# Altium PCB ST-LINK-V0.1.PcbDoc (part 2 of 3)
Units mm, origin at the board's own origin, x right, y up, seen from the top; angles counter-clockwise.
Board outline 100 x 100 mm, 2 copper layers (Top Layer, Bottom Layer); 380 components, 33 nets, 1370 pads, 550 vias.
Unrouted connection lines stored in the file: 288.
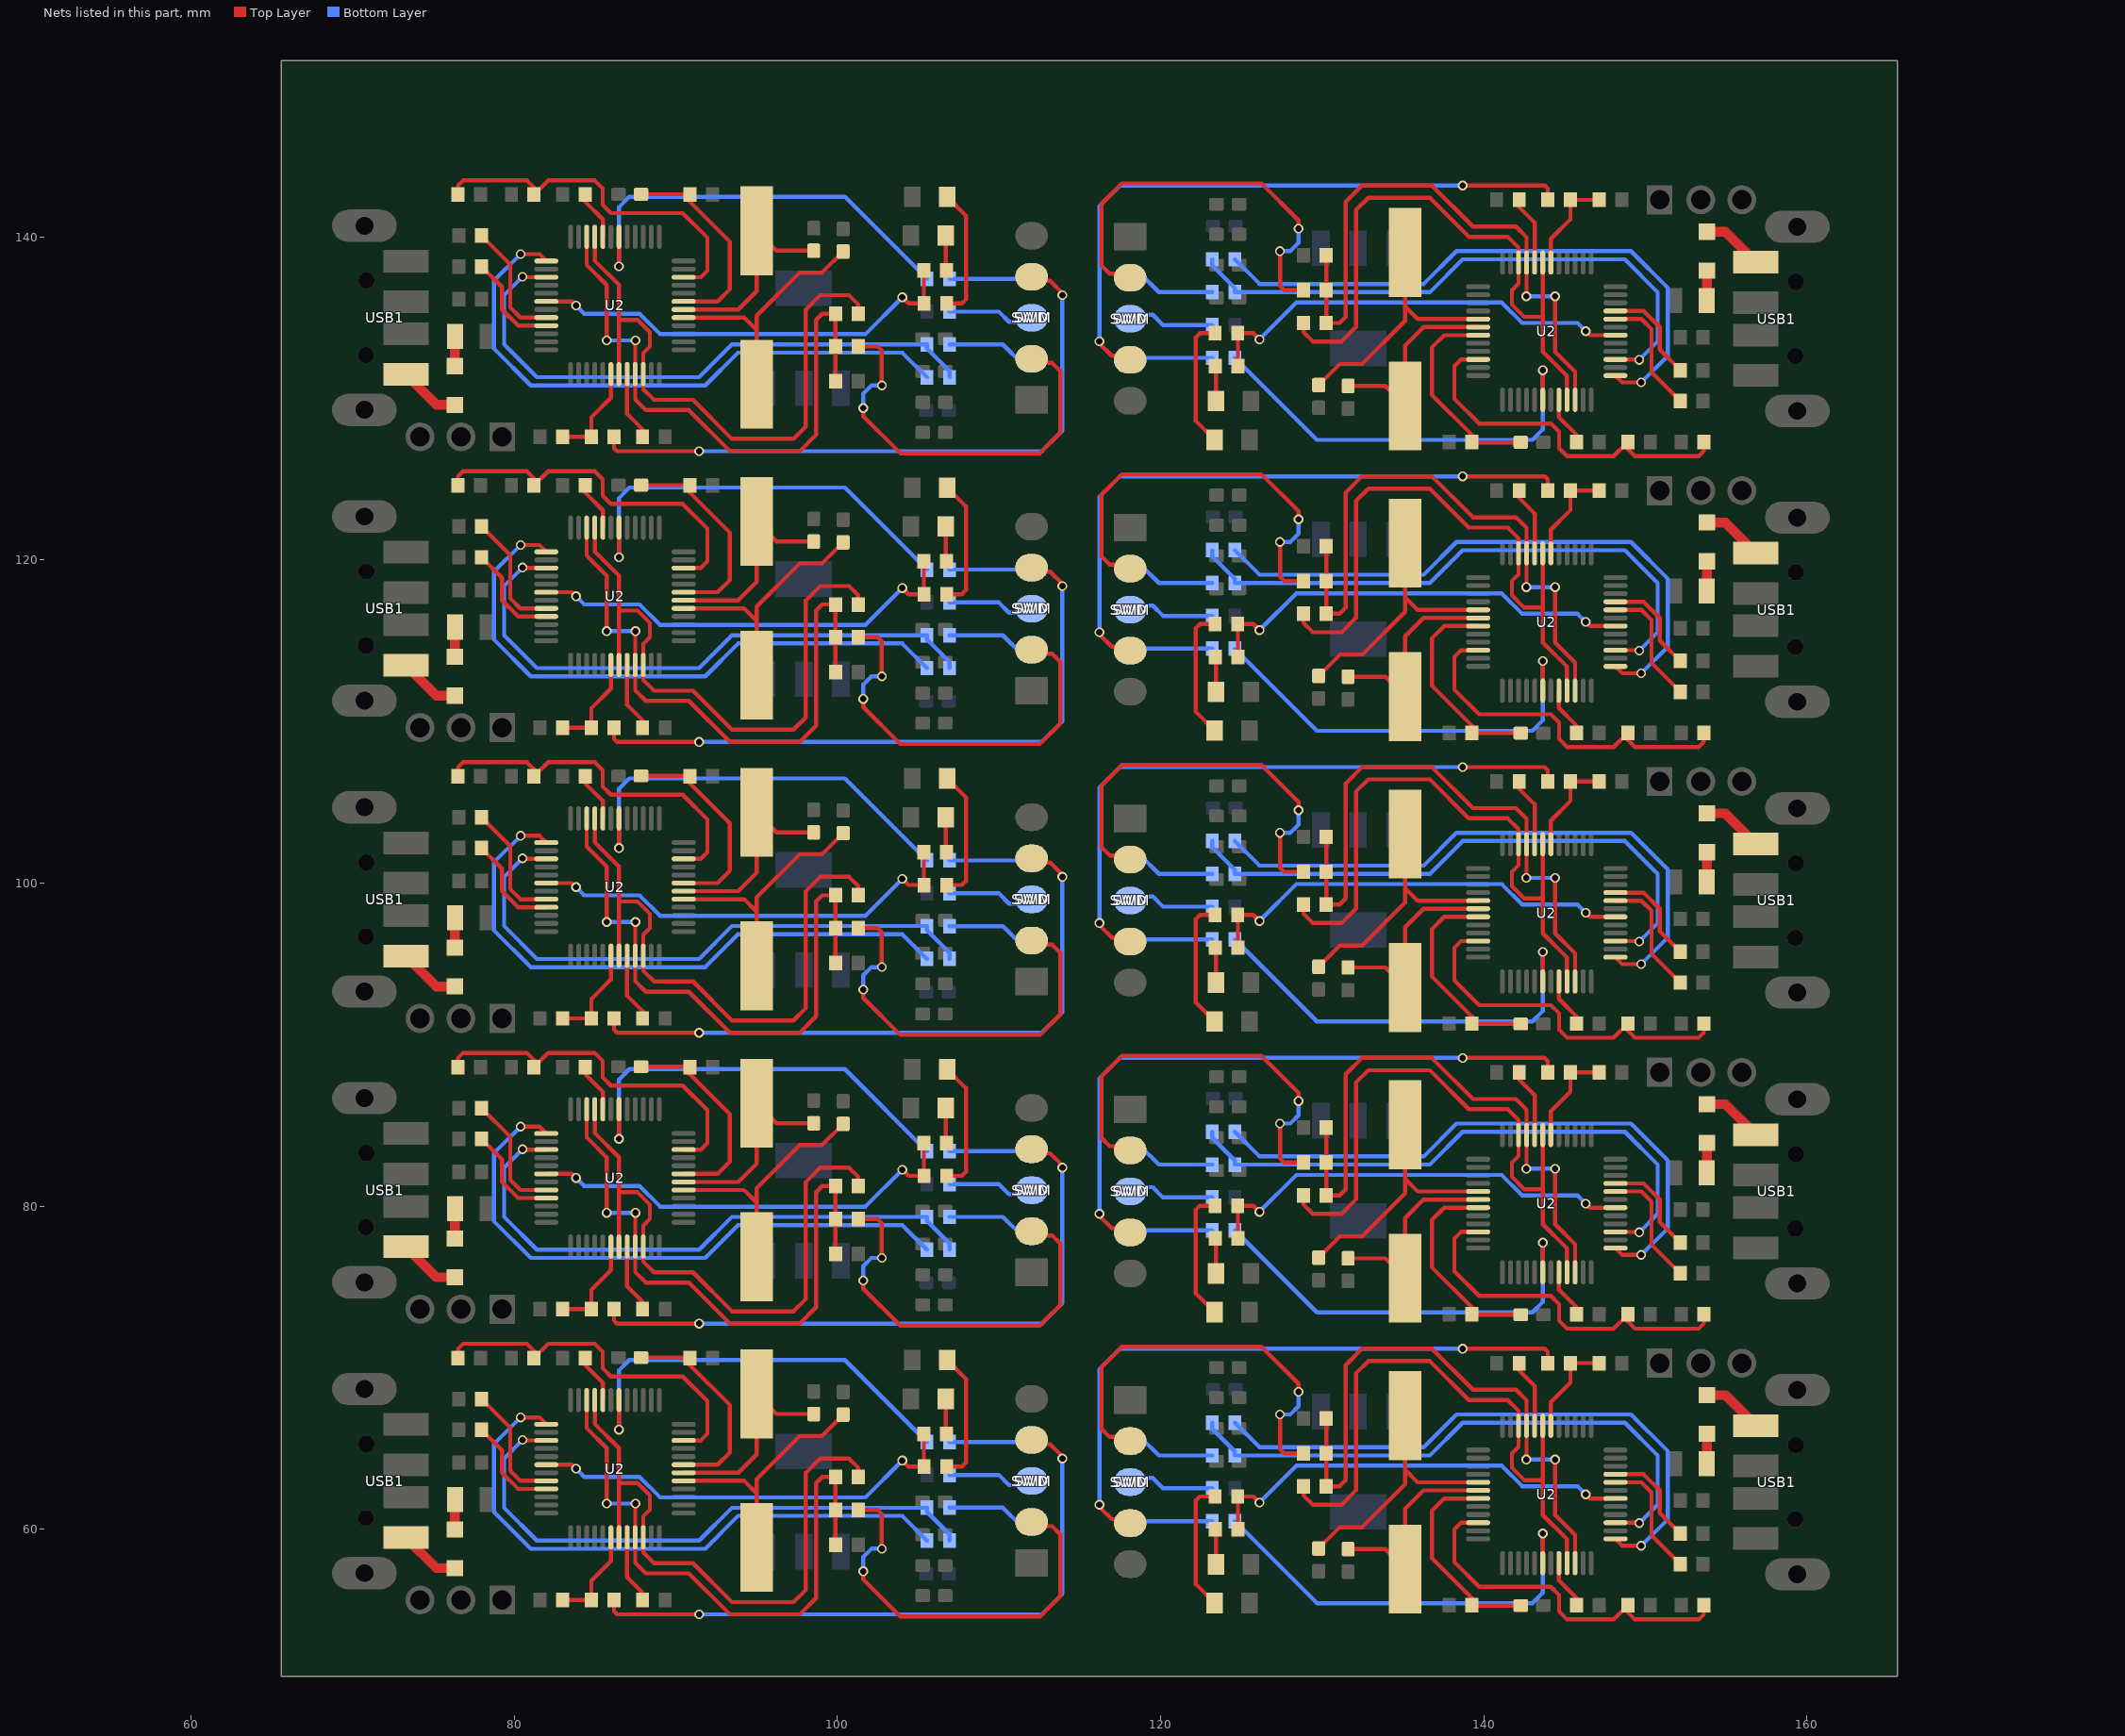
[diagram p2: the nets of this part, all layers, seen from the top]

## Via types
v1: diameter 0.6, hole 0.4, Top Layer to Bottom Layer, 520 vias
v2: diameter 0.7, hole 0.5, Top Layer to Bottom Layer, 20 vias
v3: diameter 0.8, hole 0.6, Top Layer to Bottom Layer, 10 vias

## Nets (pads, with @x,y where several pads share a name; then routed paths per layer and width w, separated by ;. In a path a pad name is that pad's centre, name@x,y a point inside that pad or via, vN(x,y) a via of type N, cw(c..) or ccw(c..) an arc to the next point about the centre after c; other vN are vias at no path point) (continued)
JTMS: R1.2 R2.2 U2.27 | length 366
  Top Layer w0.25: v1(80.518,65.532) 80.546,65.504 U2.27@81.983,65.504 ; v1(80.518,83.532) 80.546,83.504 U2.27@81.983,83.504 ; v1(80.518,101.532) 80.546,101.504 U2.27@81.983,101.504 ; v1(80.518,119.532) 80.546,119.504 U2.27@81.983,119.504 ; v1(80.518,137.532) 80.546,137.504 U2.27@81.983,137.504 ; U2.27@148.144,60.413 149.581,60.413 v1(149.609,60.385) ; U2.27@148.144,78.413 149.581,78.413 v1(149.609,78.385) ; U2.27@148.144,96.413 149.581,96.413 v1(149.609,96.385) ; U2.27@148.144,114.413 149.581,114.413 v1(149.609,114.385) ; U2.27@148.144,132.413 149.581,132.413 v1(149.609,132.385)
  Bottom Layer w0.25: v1(80.518,65.532) 79.375,64.389 79.375,61.341 81.407,59.309 91.44,59.309 93.472,61.341 R2.2@105.534,61.341 105.534,61.09 106.934,59.69 R1.2@106.934,59.309 ; v1(80.518,83.532) 79.375,82.389 79.375,79.341 81.407,77.309 91.44,77.309 93.472,79.341 R2.2@105.534,79.341 105.534,79.09 106.934,77.69 R1.2@106.934,77.309 ; v1(80.518,101.532) 79.375,100.389 79.375,97.341 81.407,95.309 91.44,95.309 93.472,97.341 R2.2@105.534,97.341 105.534,97.09 106.934,95.69 R1.2@106.934,95.309 ; v1(80.518,119.532) 79.375,118.389 79.375,115.341 81.407,113.309 91.44,113.309 93.472,115.341 R2.2@105.534,115.341 105.534,115.09 106.934,113.69 R1.2@106.934,113.309 ; v1(80.518,137.532) 79.375,136.389 79.375,133.341 81.407,131.309 91.44,131.309 93.472,133.341 R2.2@105.534,133.341 105.534,133.09 106.934,131.69 R1.2@106.934,131.309 ; R1.2@123.193,66.608 123.193,66.227 124.593,64.827 R2.2@124.593,64.576 136.655,64.576 138.687,66.608 148.72,66.608 150.752,64.576 150.752,61.528 v1(149.609,60.385) ; R1.2@123.193,84.608 123.193,84.227 124.593,82.827 R2.2@124.593,82.576 136.655,82.576 138.687,84.608 148.72,84.608 150.752,82.576 150.752,79.528 v1(149.609,78.385) ; R1.2@123.193,102.608 123.193,102.227 124.593,100.827 R2.2@124.593,100.576 136.655,100.576 138.687,102.608 148.72,102.608 150.752,100.576 150.752,97.528 v1(149.609,96.385) ; R1.2@123.193,120.608 123.193,120.227 124.593,118.827 R2.2@124.593,118.576 136.655,118.576 138.687,120.608 148.72,120.608 150.752,118.576 150.752,115.528 v1(149.609,114.385) ; R1.2@123.193,138.608 123.193,138.227 124.593,136.827 R2.2@124.593,136.576 136.655,136.576 138.687,138.608 148.72,138.608 150.752,136.576 150.752,133.528 v1(149.609,132.385)
LED: R11.1 R12.1 U2.30 | length 273.4
  Top Layer w0.254: U2.30@81.983,64.004 83.57,64.004 v1(83.82,63.754) ; U2.30@81.983,82.004 83.57,82.004 v1(83.82,81.754) ; U2.30@81.983,100.004 83.57,100.004 v1(83.82,99.754) ; U2.30@81.983,118.004 83.57,118.004 v1(83.82,117.754) ; U2.30@81.983,136.004 83.57,136.004 v1(83.82,135.754) ; v1(104.013,64.262) 104.394,63.881 R12.1@105.369,63.881 ; v1(104.013,82.262) 104.394,81.881 R12.1@105.369,81.881 ; v1(104.013,100.262) 104.394,99.881 R12.1@105.369,99.881 ; v1(104.013,118.262) 104.394,117.881 R12.1@105.369,117.881 ; v1(104.013,136.262) 104.394,135.881 R12.1@105.369,135.881 ; R12.1@105.345,63.905 R11.1@105.345,65.913 ; R12.1@105.345,81.905 R11.1@105.345,83.913 ; R12.1@105.345,99.905 R11.1@105.345,101.913 ; R12.1@105.345,117.905 R11.1@105.345,119.913 ; R12.1@105.345,135.905 R11.1@105.345,137.913 ; R12.1@124.759,62.036 125.733,62.036 v1(126.114,61.655) ; R12.1@124.759,80.036 125.733,80.036 v1(126.114,79.655) ; R12.1@124.759,98.036 125.733,98.036 v1(126.114,97.655) ; R12.1@124.759,116.036 125.733,116.036 v1(126.114,115.655) ; R12.1@124.759,134.036 125.733,134.036 v1(126.114,133.655) ; R11.1@124.782,60.004 R12.1@124.782,62.012 ; R11.1@124.782,78.004 R12.1@124.782,80.012 ; R11.1@124.782,96.004 R12.1@124.782,98.012 ; R11.1@124.782,114.004 R12.1@124.782,116.012 ; R11.1@124.782,132.004 R12.1@124.782,134.012 ; v1(146.307,62.163) 146.557,61.913 U2.30@148.144,61.913 ; v1(146.307,80.163) 146.557,79.913 U2.30@148.144,79.913 ; v1(146.307,98.163) 146.557,97.913 U2.30@148.144,97.913 ; v1(146.307,116.163) 146.557,115.913 U2.30@148.144,115.913 ; v1(146.307,134.163) 146.557,133.913 U2.30@148.144,133.913
  Bottom Layer w0.254: v1(83.82,63.754) 84.328,63.246 87.757,63.246 89.027,61.976 101.727,61.976 v1(104.013,64.262) ; v1(83.82,81.754) 84.328,81.246 87.757,81.246 89.027,79.976 101.727,79.976 v1(104.013,82.262) ; v1(83.82,99.754) 84.328,99.246 87.757,99.246 89.027,97.976 101.727,97.976 v1(104.013,100.262) ; v1(83.82,117.754) 84.328,117.246 87.757,117.246 89.027,115.976 101.727,115.976 v1(104.013,118.262) ; v1(83.82,135.754) 84.328,135.246 87.757,135.246 89.027,133.976 101.727,133.976 v1(104.013,136.262) ; v1(126.114,61.655) 128.4,63.941 141.1,63.941 142.37,62.671 145.799,62.671 v1(146.307,62.163) ; v1(126.114,79.655) 128.4,81.941 141.1,81.941 142.37,80.671 145.799,80.671 v1(146.307,80.163) ; v1(126.114,97.655) 128.4,99.941 141.1,99.941 142.37,98.671 145.799,98.671 v1(146.307,98.163) ; v1(126.114,115.655) 128.4,117.941 141.1,117.941 142.37,116.671 145.799,116.671 v1(146.307,116.163) ; v1(126.114,133.655) 128.4,135.941 141.1,135.941 142.37,134.671 145.799,134.671 v1(146.307,134.163)
NetC2_1: C2.1 U2.5 Y1.2 | length 160.8
  Top Layer w0.254: U2.5@90.483,63.004 94.222,63.004 94.996,62.23 ; U2.5@90.483,81.004 94.222,81.004 94.996,80.23 ; U2.5@90.483,99.004 94.222,99.004 94.996,98.23 ; U2.5@90.483,117.004 94.222,117.004 94.996,116.23 ; U2.5@90.483,135.004 94.222,135.004 94.996,134.23 ; Y1.2@94.996,58.877 94.996,62.23 ; Y1.2@94.996,76.877 94.996,80.23 ; Y1.2@94.996,94.877 94.996,98.23 ; Y1.2@94.996,112.877 94.996,116.23 ; Y1.2@94.996,130.877 94.996,134.23 ; C2.1@100.352,67.096 99.042,65.786 97.663,65.786 94.996,63.119 94.996,62.23 ; C2.1@100.352,85.096 99.042,83.786 97.663,83.786 94.996,81.119 94.996,80.23 ; C2.1@100.352,103.096 99.042,101.786 97.663,101.786 94.996,99.119 94.996,98.23 ; C2.1@100.352,121.096 99.042,119.786 97.663,119.786 94.996,117.119 94.996,116.23 ; C2.1@100.352,139.096 99.042,137.786 97.663,137.786 94.996,135.119 94.996,134.23 ; C2.1@129.775,58.821 131.085,60.131 132.464,60.131 135.131,62.798 135.131,63.687 ; C2.1@129.775,76.821 131.085,78.131 132.464,78.131 135.131,80.798 135.131,81.687 ; C2.1@129.775,94.821 131.085,96.131 132.464,96.131 135.131,98.798 135.131,99.687 ; C2.1@129.775,112.821 131.085,114.131 132.464,114.131 135.131,116.798 135.131,117.687 ; C2.1@129.775,130.821 131.085,132.131 132.464,132.131 135.131,134.798 135.131,135.687 ; Y1.2@135.131,67.04 135.131,63.687 ; Y1.2@135.131,85.04 135.131,81.687 ; Y1.2@135.131,103.04 135.131,99.687 ; Y1.2@135.131,121.04 135.131,117.687 ; Y1.2@135.131,139.04 135.131,135.687 ; U2.5@139.644,62.913 135.905,62.913 135.131,63.687 ; U2.5@139.644,80.913 135.905,80.913 135.131,81.687 ; U2.5@139.644,98.913 135.905,98.913 135.131,99.687 ; U2.5@139.644,116.913 135.905,116.913 135.131,117.687 ; U2.5@139.644,134.913 135.905,134.913 135.131,135.687
NetC3_2: C3.2 U2.6 Y1.1 | length 127.7
  Top Layer w0.254: U2.6@90.483,63.504 93.857,63.504 94.996,64.643 Y1.1@94.996,68.377 96.233,67.14 C3.2@98.53,67.14 ; U2.6@90.483,81.504 93.857,81.504 94.996,82.643 Y1.1@94.996,86.377 96.233,85.14 C3.2@98.53,85.14 ; U2.6@90.483,99.504 93.857,99.504 94.996,100.643 Y1.1@94.996,104.377 96.233,103.14 C3.2@98.53,103.14 ; U2.6@90.483,117.504 93.857,117.504 94.996,118.643 Y1.1@94.996,122.377 96.233,121.14 C3.2@98.53,121.14 ; U2.6@90.483,135.504 93.857,135.504 94.996,136.643 Y1.1@94.996,140.377 96.233,139.14 C3.2@98.53,139.14 ; C3.2@131.597,58.777 133.894,58.777 Y1.1@135.131,57.54 135.131,61.274 136.27,62.413 U2.6@139.644,62.413 ; C3.2@131.597,76.777 133.894,76.777 Y1.1@135.131,75.54 135.131,79.274 136.27,80.413 U2.6@139.644,80.413 ; C3.2@131.597,94.777 133.894,94.777 Y1.1@135.131,93.54 135.131,97.274 136.27,98.413 U2.6@139.644,98.413 ; C3.2@131.597,112.777 133.894,112.777 Y1.1@135.131,111.54 135.131,115.274 136.27,116.413 U2.6@139.644,116.413 ; C3.2@131.597,130.777 133.894,130.777 Y1.1@135.131,129.54 135.131,133.274 136.27,134.413 U2.6@139.644,134.413
NetD1_1: D1.1 U3.1 | length 18.5
  Top Layer w0.6: D1.1@76.327,60.001 76.327,61.833 U3.1@76.343,61.849 ; D1.1@76.327,78.001 76.327,79.833 U3.1@76.343,79.849 ; D1.1@76.327,96.001 76.327,97.833 U3.1@76.343,97.849 ; D1.1@76.327,114.001 76.327,115.833 U3.1@76.343,115.849 ; D1.1@76.327,132.001 76.327,133.833 U3.1@76.343,133.849 ; U3.1@153.784,64.068 153.8,64.084 D1.1@153.8,65.916 ; U3.1@153.784,82.068 153.8,82.084 D1.1@153.8,83.916 ; U3.1@153.784,100.068 153.8,100.084 D1.1@153.8,101.916 ; U3.1@153.784,118.068 153.8,118.084 D1.1@153.8,119.916 ; U3.1@153.784,136.068 153.8,136.084 D1.1@153.8,137.916
NetD1_2: D1.2 USB1.1 | length 43.1
  Top Layer w0.254: USB1.1@73.292,59.492 USB1.1@73.786,59.492 ; USB1.1@73.292,77.492 USB1.1@73.786,77.492 ; USB1.1@73.292,95.492 USB1.1@73.786,95.492 ; USB1.1@73.292,113.492 USB1.1@73.786,113.492 ; USB1.1@73.292,131.492 USB1.1@73.786,131.492 ; USB1.1@156.341,66.425 USB1.1@156.836,66.425 ; USB1.1@156.341,84.425 USB1.1@156.836,84.425 ; USB1.1@156.341,102.425 USB1.1@156.836,102.425 ; USB1.1@156.341,120.425 USB1.1@156.836,120.425 ; USB1.1@156.341,138.425 USB1.1@156.836,138.425
  Top Layer w0.6: USB1.1@73.292,59.492 75.183,57.601 D1.2@76.327,57.601 ; USB1.1@73.292,77.492 75.183,75.601 D1.2@76.327,75.601 ; USB1.1@73.292,95.492 75.183,93.601 D1.2@76.327,93.601 ; USB1.1@73.292,113.492 75.183,111.601 D1.2@76.327,111.601 ; USB1.1@73.292,131.492 75.183,129.601 D1.2@76.327,129.601 ; D1.2@153.8,68.316 154.945,68.316 USB1.1@156.836,66.425 ; D1.2@153.8,86.316 154.945,86.316 USB1.1@156.836,84.425 ; D1.2@153.8,104.316 154.945,104.316 USB1.1@156.836,102.425 ; D1.2@153.8,122.316 154.945,122.316 USB1.1@156.836,120.425 ; D1.2@153.8,140.316 154.945,140.316 USB1.1@156.836,138.425
NetHL1_2: HL1.2 R11.2 | length 21.2
  Top Layer w0.254: R11.2@106.699,65.959 HL1.2@106.699,68.079 ; R11.2@106.699,83.959 HL1.2@106.699,86.079 ; R11.2@106.699,101.959 HL1.2@106.699,104.079 ; R11.2@106.699,119.959 HL1.2@106.699,122.079 ; R11.2@106.699,137.959 HL1.2@106.699,140.079 ; HL1.2@123.428,57.838 R11.2@123.428,59.958 ; HL1.2@123.428,75.838 R11.2@123.428,77.958 ; HL1.2@123.428,93.838 R11.2@123.428,95.958 ; HL1.2@123.428,111.838 R11.2@123.428,113.958 ; HL1.2@123.428,129.838 R11.2@123.428,131.958
NetHL2_1: HL2.1 R12.2 | length 81.1
  Top Layer w0.254: R12.2@106.769,63.881 107.696,63.881 107.95,64.135 107.95,69.315 HL2.1@106.788,70.478 ; R12.2@106.769,81.881 107.696,81.881 107.95,82.135 107.95,87.316 HL2.1@106.788,88.478 ; R12.2@106.769,99.881 107.696,99.881 107.95,100.135 107.95,105.316 HL2.1@106.788,106.478 ; R12.2@106.769,117.881 107.696,117.881 107.95,118.135 107.95,123.316 HL2.1@106.788,124.478 ; R12.2@106.769,135.881 107.696,135.881 107.95,136.135 107.95,141.316 HL2.1@106.788,142.478 ; HL2.1@123.34,55.439 122.177,56.601 122.177,61.782 122.431,62.036 R12.2@123.359,62.036 ; HL2.1@123.34,73.439 122.177,74.601 122.177,79.782 122.431,80.036 R12.2@123.359,80.036 ; HL2.1@123.34,91.439 122.177,92.601 122.177,97.782 122.431,98.036 R12.2@123.359,98.036 ; HL2.1@123.34,109.439 122.177,110.601 122.177,115.782 122.431,116.036 R12.2@123.359,116.036 ; HL2.1@123.34,127.439 122.177,128.601 122.177,133.782 122.431,134.036 R12.2@123.359,134.036
NetJ1_2: R2.1 SWD.2 | length 54.3
  Bottom Layer w0.254: R2.1@106.934,61.341 110.236,61.341 111.379,60.198 SWD.2@111.887,60.198 ; R2.1@106.934,79.341 110.236,79.341 111.379,78.198 SWD.2@111.887,78.198 ; R2.1@106.934,97.341 110.236,97.341 111.379,96.198 SWD.2@111.887,96.198 ; R2.1@106.934,115.341 110.236,115.341 111.379,114.198 SWD.2@111.887,114.198 ; R2.1@106.934,133.341 110.236,133.341 111.379,132.198 SWD.2@111.887,132.198 ; SWD.2@118.24,65.719 118.748,65.719 119.891,64.576 R2.1@123.193,64.576 ; SWD.2@118.24,83.719 118.748,83.719 119.891,82.576 R2.1@123.193,82.576 ; SWD.2@118.24,101.719 118.748,101.719 119.891,100.576 R2.1@123.193,100.576 ; SWD.2@118.24,119.719 118.748,119.719 119.891,118.576 R2.1@123.193,118.576 ; SWD.2@118.24,137.719 118.748,137.719 119.891,136.576 R2.1@123.193,136.576
NetJ1_3: R3.1 SWD.3 | length 53.4
  Bottom Layer w0.254: R3.1@106.934,63.373 109.982,63.373 110.617,62.738 SWD.3@112.014,62.738 ; R3.1@106.934,81.373 109.982,81.373 110.617,80.738 SWD.3@112.014,80.738 ; R3.1@106.934,99.373 109.982,99.373 110.617,98.738 SWD.3@112.014,98.738 ; R3.1@106.934,117.373 109.982,117.373 110.617,116.738 SWD.3@112.014,116.738 ; R3.1@106.934,135.373 109.982,135.373 110.617,134.738 SWD.3@112.014,134.738 ; SWD.3@118.113,63.179 119.51,63.179 120.145,62.544 R3.1@123.193,62.544 ; SWD.3@118.113,81.179 119.51,81.179 120.145,80.544 R3.1@123.193,80.544 ; SWD.3@118.113,99.179 119.51,99.179 120.145,98.544 R3.1@123.193,98.544 ; SWD.3@118.113,117.179 119.51,117.179 120.145,116.544 R3.1@123.193,116.544 ; SWD.3@118.113,135.179 119.51,135.179 120.145,134.544 R3.1@123.193,134.544
NetJ1_4: R4.1 SWD.4 | length 48.3
  Bottom Layer w0.254: R4.1@106.934,65.405 SWD.4@111.76,65.405 ; R4.1@106.934,83.405 SWD.4@111.76,83.405 ; R4.1@106.934,101.405 SWD.4@111.76,101.405 ; R4.1@106.934,119.405 SWD.4@111.76,119.405 ; R4.1@106.934,137.405 SWD.4@111.76,137.405 ; SWD.4@118.367,60.512 R4.1@123.193,60.512 ; SWD.4@118.367,78.512 R4.1@123.193,78.512 ; SWD.4@118.367,96.512 R4.1@123.193,96.512 ; SWD.4@118.367,114.512 R4.1@123.193,114.512 ; SWD.4@118.367,132.512 R4.1@123.193,132.512
NetJ2_2: R10.1 SWIM.2 | length 260.6
  Top Layer w0.254: R10.1@101.284,61.214 102.489,61.214 102.743,60.96 v1(102.743,58.801) ; R10.1@101.284,79.214 102.489,79.214 102.743,78.96 v1(102.743,76.801) ; R10.1@101.284,97.214 102.489,97.214 102.743,96.96 v1(102.743,94.801) ; R10.1@101.284,115.214 102.489,115.214 102.743,114.96 v1(102.743,112.801) ; R10.1@101.284,133.214 102.489,133.214 102.743,132.96 v1(102.743,130.801) ; v1(101.6,57.404) 101.6,56.896 103.886,54.61 112.522,54.61 113.792,55.88 113.792,59.69 113.284,60.198 SWIM.2@111.887,60.198 ; v1(101.6,75.404) 101.6,74.896 103.886,72.61 112.522,72.61 113.792,73.88 113.792,77.69 113.284,78.198 SWIM.2@111.887,78.198 ; v1(101.6,93.404) 101.6,92.896 103.886,90.61 112.522,90.61 113.792,91.88 113.792,95.69 113.284,96.198 SWIM.2@111.887,96.198 ; v1(101.6,111.404) 101.6,110.896 103.886,108.61 112.522,108.61 113.792,109.88 113.792,113.69 113.284,114.198 SWIM.2@111.887,114.198 ; v1(101.6,129.404) 101.6,128.896 103.886,126.61 112.522,126.61 113.792,127.88 113.792,131.69 113.284,132.198 SWIM.2@111.887,132.198 ; SWIM.2@118.24,65.719 116.843,65.719 116.335,66.227 116.335,70.037 117.605,71.307 126.241,71.307 128.527,69.021 v1(128.527,68.513) ; SWIM.2@118.24,83.719 116.843,83.719 116.335,84.227 116.335,88.037 117.605,89.307 126.241,89.307 128.527,87.021 v1(128.527,86.513) ; SWIM.2@118.24,101.719 116.843,101.719 116.335,102.227 116.335,106.037 117.605,107.307 126.241,107.307 128.527,105.021 v1(128.527,104.513) ; SWIM.2@118.24,119.719 116.843,119.719 116.335,120.227 116.335,124.037 117.605,125.307 126.241,125.307 128.527,123.021 v1(128.527,122.513) ; SWIM.2@118.24,137.719 116.843,137.719 116.335,138.227 116.335,142.037 117.605,143.307 126.241,143.307 128.527,141.021 v1(128.527,140.513) ; v1(127.384,67.116) 127.384,64.957 127.638,64.703 R10.1@128.844,64.703 ; v1(127.384,85.116) 127.384,82.957 127.638,82.703 R10.1@128.844,82.703 ; v1(127.384,103.116) 127.384,100.957 127.638,100.703 R10.1@128.844,100.703 ; v1(127.384,121.116) 127.384,118.957 127.638,118.703 R10.1@128.844,118.703 ; v1(127.384,139.116) 127.384,136.957 127.638,136.703 R10.1@128.844,136.703
  Bottom Layer w0.254: v1(101.6,57.404) 101.6,58.293 102.108,58.801 v1(102.743,58.801) ; v1(101.6,75.404) 101.6,76.293 102.108,76.801 v1(102.743,76.801) ; v1(101.6,93.404) 101.6,94.293 102.108,94.801 v1(102.743,94.801) ; v1(101.6,111.404) 101.6,112.293 102.108,112.801 v1(102.743,112.801) ; v1(101.6,129.404) 101.6,130.293 102.108,130.801 v1(102.743,130.801) ; v1(127.384,67.116) 128.019,67.116 128.527,67.624 v1(128.527,68.513) ; v1(127.384,85.116) 128.019,85.116 128.527,85.624 v1(128.527,86.513) ; v1(127.384,103.116) 128.019,103.116 128.527,103.624 v1(128.527,104.513) ; v1(127.384,121.116) 128.019,121.116 128.527,121.624 v1(128.527,122.513) ; v1(127.384,139.116) 128.019,139.116 128.527,139.624 v1(128.527,140.513)
NetJ2_4: R13.1 SWIM.4 | length 399.1
  Top Layer w0.254: R13.1@86.171,55.626 86.171,54.926 86.36,54.737 v1(91.44,54.737) ; R13.1@86.171,73.626 86.171,72.926 86.36,72.737 v1(91.44,72.737) ; R13.1@86.171,91.626 86.171,90.926 86.36,90.737 v1(91.44,90.737) ; R13.1@86.171,109.626 86.171,108.926 86.36,108.737 v1(91.44,108.737) ; R13.1@86.171,127.626 86.171,126.926 86.36,126.737 v1(91.44,126.737) ; SWIM.4@111.887,65.278 113.157,65.278 113.919,64.516 v1(113.919,64.389) ; SWIM.4@111.887,83.278 113.157,83.278 113.919,82.516 v1(113.919,82.389) ; SWIM.4@111.887,101.278 113.157,101.278 113.919,100.516 v1(113.919,100.389) ; SWIM.4@111.887,119.278 113.157,119.278 113.919,118.516 v1(113.919,118.389) ; SWIM.4@111.887,137.278 113.157,137.278 113.919,136.516 v1(113.919,136.389) ; v1(116.208,61.528) 116.208,61.401 116.97,60.639 SWIM.4@118.24,60.639 ; v1(116.208,79.528) 116.208,79.401 116.97,78.639 SWIM.4@118.24,78.639 ; v1(116.208,97.528) 116.208,97.401 116.97,96.639 SWIM.4@118.24,96.639 ; v1(116.208,115.528) 116.208,115.401 116.97,114.639 SWIM.4@118.24,114.639 ; v1(116.208,133.528) 116.208,133.401 116.97,132.639 SWIM.4@118.24,132.639 ; v1(138.687,71.18) 143.767,71.18 143.957,70.991 R13.1@143.957,70.291 ; v1(138.687,89.18) 143.767,89.18 143.957,88.991 R13.1@143.957,88.291 ; v1(138.687,107.18) 143.767,107.18 143.957,106.991 R13.1@143.957,106.291 ; v1(138.687,125.18) 143.767,125.18 143.957,124.991 R13.1@143.957,124.291 ; v1(138.687,143.18) 143.767,143.18 143.957,142.991 R13.1@143.957,142.291
  Bottom Layer w0.254: v1(91.44,54.737) 112.649,54.737 113.919,56.007 v1(113.919,64.389) ; v1(91.44,72.737) 112.649,72.737 113.919,74.007 v1(113.919,82.389) ; v1(91.44,90.737) 112.649,90.737 113.919,92.007 v1(113.919,100.389) ; v1(91.44,108.737) 112.649,108.737 113.919,110.007 v1(113.919,118.389) ; v1(91.44,126.737) 112.649,126.737 113.919,128.007 v1(113.919,136.389) ; v1(116.208,61.528) 116.208,69.91 117.478,71.18 v1(138.687,71.18) ; v1(116.208,79.528) 116.208,87.91 117.478,89.18 v1(138.687,89.18) ; v1(116.208,97.528) 116.208,105.91 117.478,107.18 v1(138.687,107.18) ; v1(116.208,115.528) 116.208,123.91 117.478,125.18 v1(138.687,125.18) ; v1(116.208,133.528) 116.208,141.91 117.478,143.18 v1(138.687,143.18)
NetR5_2: R5.2 R6.1 U2.10 | length 228.4
  Top Layer w0.254: R6.1@76.516,70.612 76.516,71.172 76.835,71.491 80.782,71.491 81.218,71.055 R5.2@81.218,70.612 82.097,71.491 84.973,71.491 85.471,70.993 85.471,69.977 85.979,69.469 90.424,69.469 91.948,67.945 91.948,65.913 91.539,65.504 U2.10@90.483,65.504 ; R6.1@76.516,88.612 76.516,89.172 76.835,89.491 80.782,89.491 81.218,89.055 R5.2@81.218,88.612 82.097,89.491 84.973,89.491 85.471,88.993 85.471,87.977 85.979,87.469 90.424,87.469 91.948,85.945 91.948,83.913 91.539,83.504 U2.10@90.483,83.504 ; R6.1@76.516,106.612 76.516,107.172 76.835,107.491 80.782,107.491 81.218,107.055 R5.2@81.218,106.612 82.097,107.491 84.973,107.491 85.471,106.993 85.471,105.977 85.979,105.469 90.424,105.469 91.948,103.945 91.948,101.913 91.539,101.504 U2.10@90.483,101.504 ; R6.1@76.516,124.612 76.516,125.172 76.835,125.491 80.782,125.491 81.218,125.055 R5.2@81.218,124.612 82.097,125.491 84.973,125.491 85.471,124.993 85.471,123.977 85.979,123.469 90.424,123.469 91.948,121.945 91.948,119.913 91.539,119.504 U2.10@90.483,119.504 ; R6.1@76.516,142.612 76.516,143.172 76.835,143.491 80.782,143.491 81.218,143.055 R5.2@81.218,142.612 82.097,143.491 84.973,143.491 85.471,142.993 85.471,141.977 85.979,141.469 90.424,141.469 91.948,139.945 91.948,137.913 91.539,137.504 U2.10@90.483,137.504 ; U2.10@139.644,60.413 138.588,60.413 138.179,60.004 138.179,57.972 139.703,56.448 144.148,56.448 144.656,55.94 144.656,54.924 145.154,54.426 148.03,54.426 R5.2@148.909,55.305 148.909,54.862 149.345,54.426 153.292,54.426 153.611,54.745 R6.1@153.611,55.305 ; U2.10@139.644,78.413 138.588,78.413 138.179,78.004 138.179,75.972 139.703,74.448 144.148,74.448 144.656,73.94 144.656,72.924 145.154,72.426 148.03,72.426 R5.2@148.909,73.305 148.909,72.862 149.345,72.426 153.292,72.426 153.611,72.745 R6.1@153.611,73.305 ; U2.10@139.644,96.413 138.588,96.413 138.179,96.004 138.179,93.972 139.703,92.448 144.148,92.448 144.656,91.94 144.656,90.924 145.154,90.426 148.03,90.426 R5.2@148.909,91.305 148.909,90.862 149.345,90.426 153.292,90.426 153.611,90.745 R6.1@153.611,91.305 ; U2.10@139.644,114.413 138.588,114.413 138.179,114.004 138.179,111.972 139.703,110.448 144.148,110.448 144.656,109.94 144.656,108.924 145.154,108.426 148.03,108.426 R5.2@148.909,109.305 148.909,108.862 149.345,108.426 153.292,108.426 153.611,108.745 R6.1@153.611,109.305 ; U2.10@139.644,132.413 138.588,132.413 138.179,132.004 138.179,129.972 139.703,128.448 144.148,128.448 144.656,127.94 144.656,126.924 145.154,126.426 148.03,126.426 R5.2@148.909,127.305 148.909,126.862 149.345,126.426 153.292,126.426 153.611,126.745 R6.1@153.611,127.305
NetR8_1: R8.1 U2.20 | length 30.6
  Top Layer w0.254: R8.1@84.393,70.612 84.393,70.166 85.483,69.076 U2.20@85.483,68.004 ; R8.1@84.393,88.612 84.393,88.166 85.483,87.076 U2.20@85.483,86.004 ; R8.1@84.393,106.612 84.393,106.166 85.483,105.076 U2.20@85.483,104.004 ; R8.1@84.393,124.612 84.393,124.166 85.483,123.076 U2.20@85.483,122.004 ; R8.1@84.393,142.612 84.393,142.166 85.483,141.076 U2.20@85.483,140.004 ; U2.20@144.644,57.913 144.644,56.841 145.735,55.751 R8.1@145.735,55.305 ; U2.20@144.644,75.913 144.644,74.841 145.735,73.751 R8.1@145.735,73.305 ; U2.20@144.644,93.913 144.644,92.841 145.735,91.751 R8.1@145.735,91.305 ; U2.20@144.644,111.913 144.644,110.841 145.735,109.751 R8.1@145.735,109.305 ; U2.20@144.644,129.913 144.644,128.841 145.735,127.751 R8.1@145.735,127.305
NetR15_2: R15.2 U2.32 | length 76.7
  Top Layer w0.254: R15.2@77.978,68.072 79.756,66.294 79.756,63.627 80.379,63.004 U2.32@81.983,63.004 ; R15.2@77.978,86.072 79.756,84.294 79.756,81.627 80.379,81.004 U2.32@81.983,81.004 ; R15.2@77.978,104.072 79.756,102.294 79.756,99.627 80.379,99.004 U2.32@81.983,99.004 ; R15.2@77.978,122.072 79.756,120.294 79.756,117.627 80.379,117.004 U2.32@81.983,117.004 ; R15.2@77.978,140.072 79.756,138.294 79.756,135.627 80.379,135.004 U2.32@81.983,135.004 ; U2.32@148.144,62.913 149.748,62.913 150.371,62.29 150.371,59.623 R15.2@152.149,57.845 ; U2.32@148.144,80.913 149.748,80.913 150.371,80.29 150.371,77.623 R15.2@152.149,75.845 ; U2.32@148.144,98.913 149.748,98.913 150.371,98.29 150.371,95.623 R15.2@152.149,93.845 ; U2.32@148.144,116.913 149.748,116.913 150.371,116.29 150.371,113.623 R15.2@152.149,111.845 ; U2.32@148.144,134.913 149.748,134.913 150.371,134.29 150.371,131.623 R15.2@152.149,129.845
NetR17_2: R17.2 U2.33 | length 63.4
  Top Layer w0.254: R17.2@77.978,66.167 79.248,64.897 79.248,63.5 80.244,62.504 U2.33@81.983,62.504 ; R17.2@77.978,84.167 79.248,82.897 79.248,81.5 80.244,80.504 U2.33@81.983,80.504 ; R17.2@77.978,102.167 79.248,100.897 79.248,99.5 80.244,98.504 U2.33@81.983,98.504 ; R17.2@77.978,120.167 79.248,118.897 79.248,117.5 80.244,116.504 U2.33@81.983,116.504 ; R17.2@77.978,138.167 79.248,136.897 79.248,135.5 80.244,134.504 U2.33@81.983,134.504 ; U2.33@148.144,63.413 149.883,63.413 150.879,62.417 150.879,61.02 R17.2@152.149,59.75 ; U2.33@148.144,81.413 149.883,81.413 150.879,80.417 150.879,79.02 R17.2@152.149,77.75 ; U2.33@148.144,99.413 149.883,99.413 150.879,98.417 150.879,97.02 R17.2@152.149,95.75 ; U2.33@148.144,117.413 149.883,117.413 150.879,116.417 150.879,115.02 R17.2@152.149,113.75 ; U2.33@148.144,135.413 149.883,135.413 150.879,134.417 150.879,133.02 R17.2@152.149,131.75
NetR18_2: R18.2 U2.44 | length 42.8
  Top Layer w0.254: U2.44@86.983,59.504 86.983,57.035 87.946,56.072 R18.2@87.946,55.626 ; U2.44@86.983,77.504 86.983,75.035 87.946,74.072 R18.2@87.946,73.626 ; U2.44@86.983,95.504 86.983,93.035 87.946,92.072 R18.2@87.946,91.626 ; U2.44@86.983,113.504 86.983,111.035 87.946,110.072 R18.2@87.946,109.626 ; U2.44@86.983,131.504 86.983,129.035 87.946,128.072 R18.2@87.946,127.626 ; R18.2@142.181,70.291 142.181,69.845 143.144,68.882 U2.44@143.144,66.413 ; R18.2@142.181,88.291 142.181,87.845 143.144,86.882 U2.44@143.144,84.413 ; R18.2@142.181,106.291 142.181,105.845 143.144,104.882 U2.44@143.144,102.413 ; R18.2@142.181,124.291 142.181,123.845 143.144,122.882 U2.44@143.144,120.413 ; R18.2@142.181,142.291 142.181,141.845 143.144,140.882 U2.44@143.144,138.413
NRST: R4.2 U2.18 | length 269.3
  Top Layer w0.25: v1(86.483,66.171) U2.18@86.483,68.004 ; v1(86.483,84.171) U2.18@86.483,86.004 ; v1(86.483,102.171) U2.18@86.483,104.004 ; v1(86.483,120.171) U2.18@86.483,122.004 ; v1(86.483,138.171) U2.18@86.483,140.004 ; U2.18@143.644,57.913 v1(143.644,59.746) ; U2.18@143.644,75.913 v1(143.644,77.746) ; U2.18@143.644,93.913 v1(143.644,95.746) ; U2.18@143.644,111.913 v1(143.644,113.746) ; U2.18@143.644,129.913 v1(143.644,131.746)
  Bottom Layer w0.25: v1(86.483,66.171) 86.487,66.175 86.487,69.85 87.122,70.485 100.454,70.485 R4.2@105.534,65.405 ; v1(86.483,84.171) 86.487,84.175 86.487,87.85 87.122,88.485 100.454,88.485 R4.2@105.534,83.405 ; v1(86.483,102.171) 86.487,102.175 86.487,105.85 87.122,106.485 100.454,106.485 R4.2@105.534,101.405 ; v1(86.483,120.171) 86.487,120.175 86.487,123.85 87.122,124.485 100.454,124.485 R4.2@105.534,119.405 ; v1(86.483,138.171) 86.487,138.175 86.487,141.85 87.122,142.485 100.454,142.485 R4.2@105.534,137.405 ; R4.2@124.593,60.512 129.673,55.432 143.005,55.432 143.64,56.067 143.64,59.742 v1(143.644,59.746) ; R4.2@124.593,78.512 129.673,73.432 143.005,73.432 143.64,74.067 143.64,77.742 v1(143.644,77.746) ; R4.2@124.593,96.512 129.673,91.432 143.005,91.432 143.64,92.067 143.64,95.742 v1(143.644,95.746) ; R4.2@124.593,114.512 129.673,109.432 143.005,109.432 143.64,110.067 143.64,113.742 v1(143.644,113.746) ; R4.2@124.593,132.512 129.673,127.432 143.005,127.432 143.64,128.067 143.64,131.742 v1(143.644,131.746)
RST: C4.1 R19.2 U2.7 | length 131.7
  Top Layer w0.254: C4.1@87.757,70.634 90.845,70.634 R19.2@90.867,70.612 90.867,70.169 93.345,67.691 93.345,64.77 92.579,64.004 U2.7@90.483,64.004 ; C4.1@87.757,88.634 90.845,88.634 R19.2@90.867,88.612 90.867,88.169 93.345,85.691 93.345,82.77 92.579,82.004 U2.7@90.483,82.004 ; C4.1@87.757,106.634 90.845,106.634 R19.2@90.867,106.612 90.867,106.169 93.345,103.691 93.345,100.77 92.579,100.004 U2.7@90.483,100.004 ; C4.1@87.757,124.634 90.845,124.634 R19.2@90.867,124.612 90.867,124.169 93.345,121.691 93.345,118.77 92.579,118.004 U2.7@90.483,118.004 ; C4.1@87.757,142.634 90.845,142.634 R19.2@90.867,142.612 90.867,142.169 93.345,139.691 93.345,136.77 92.579,136.004 U2.7@90.483,136.004 ; U2.7@139.644,61.913 137.548,61.913 136.782,61.147 136.782,58.226 139.26,55.748 R19.2@139.26,55.305 139.282,55.283 C4.1@142.37,55.283 ; U2.7@139.644,79.913 137.548,79.913 136.782,79.147 136.782,76.226 139.26,73.748 R19.2@139.26,73.305 139.282,73.283 C4.1@142.37,73.283 ; U2.7@139.644,97.913 137.548,97.913 136.782,97.147 136.782,94.226 139.26,91.748 R19.2@139.26,91.305 139.282,91.283 C4.1@142.37,91.283 ; U2.7@139.644,115.913 137.548,115.913 136.782,115.147 136.782,112.226 139.26,109.748 R19.2@139.26,109.305 139.282,109.283 C4.1@142.37,109.283 ; U2.7@139.644,133.913 137.548,133.913 136.782,133.147 136.782,130.226 139.26,127.748 R19.2@139.26,127.305 139.282,127.283 C4.1@142.37,127.283
"SWDIO IN": R1.1 U2.25 | length 375.1
  Top Layer w0.25: v1(80.391,66.929) 81.558,66.929 U2.25@81.983,66.504 ; v1(80.391,84.929) 81.558,84.929 U2.25@81.983,84.504 ; v1(80.391,102.929) 81.558,102.929 U2.25@81.983,102.504 ; v1(80.391,120.929) 81.558,120.929 U2.25@81.983,120.504 ; v1(80.391,138.929) 81.558,138.929 U2.25@81.983,138.504 ; U2.25@148.144,59.413 148.569,58.988 v1(149.736,58.988) ; U2.25@148.144,77.413 148.569,76.988 v1(149.736,76.988) ; U2.25@148.144,95.413 148.569,94.988 v1(149.736,94.988) ; U2.25@148.144,113.413 148.569,112.988 v1(149.736,112.988) ; U2.25@148.144,131.413 148.569,130.988 v1(149.736,130.988)
  Bottom Layer w0.25: v1(80.391,66.929) 78.74,65.278 78.74,61.087 81.026,58.801 91.821,58.801 93.853,60.833 104.01,60.833 R1.1@105.534,59.309 ; v1(80.391,84.929) 78.74,83.278 78.74,79.087 81.026,76.801 91.821,76.801 93.853,78.833 104.01,78.833 R1.1@105.534,77.309 ; v1(80.391,102.929) 78.74,101.278 78.74,97.087 81.026,94.801 91.821,94.801 93.853,96.833 104.01,96.833 R1.1@105.534,95.309 ; v1(80.391,120.929) 78.74,119.278 78.74,115.087 81.026,112.801 91.821,112.801 93.853,114.833 104.01,114.833 R1.1@105.534,113.309 ; v1(80.391,138.929) 78.74,137.278 78.74,133.087 81.026,130.801 91.821,130.801 93.853,132.833 104.01,132.833 R1.1@105.534,131.309 ; R1.1@124.593,66.608 126.117,65.084 136.274,65.084 138.306,67.116 149.101,67.116 151.387,64.83 151.387,60.639 v1(149.736,58.988) ; R1.1@124.593,84.608 126.117,83.084 136.274,83.084 138.306,85.116 149.101,85.116 151.387,82.83 151.387,78.639 v1(149.736,76.988) ; R1.1@124.593,102.608 126.117,101.084 136.274,101.084 138.306,103.116 149.101,103.116 151.387,100.83 151.387,96.639 v1(149.736,94.988) ; R1.1@124.593,120.608 126.117,119.084 136.274,119.084 138.306,121.116 149.101,121.116 151.387,118.83 151.387,114.639 v1(149.736,112.988) ; R1.1@124.593,138.608 126.117,137.084 136.274,137.084 138.306,139.116 149.101,139.116 151.387,136.83 151.387,132.639 v1(149.736,130.988)
SWIM: R7.1 R9.1 R10.2 U2.22 U2.45 | length 379.8
  Top Layer w0.254: U2.22@84.483,68.004 84.483,66.266 85.725,65.024 v1(85.725,61.595) ; U2.22@84.483,86.004 84.483,84.266 85.725,83.024 v1(85.725,79.595) ; U2.22@84.483,104.004 84.483,102.266 85.725,101.024 v1(85.725,97.595) ; U2.22@84.483,122.004 84.483,120.266 85.725,119.024 v1(85.725,115.595) ; U2.22@84.483,140.004 84.483,138.266 85.725,137.024 v1(85.725,133.595) ; v1(87.503,61.595) 87.483,61.575 U2.45@87.483,59.504 87.483,57.932 88.138,57.277 90.805,57.277 93.345,54.737 97.663,54.737 98.679,55.753 98.679,62.865 99.06,63.246 R9.1@99.884,63.246 R7.1@99.884,59.055 ; v1(87.503,79.595) 87.483,79.575 U2.45@87.483,77.504 87.483,75.932 88.138,75.277 90.805,75.277 93.345,72.737 97.663,72.737 98.679,73.753 98.679,80.865 99.06,81.246 R9.1@99.884,81.246 R7.1@99.884,77.055 ; v1(87.503,97.595) 87.483,97.575 U2.45@87.483,95.504 87.483,93.932 88.138,93.277 90.805,93.277 93.345,90.737 97.663,90.737 98.679,91.753 98.679,98.865 99.06,99.246 R9.1@99.884,99.246 R7.1@99.884,95.055 ; v1(87.503,115.595) 87.483,115.575 U2.45@87.483,113.504 87.483,111.932 88.138,111.277 90.805,111.277 93.345,108.737 97.663,108.737 98.679,109.753 98.679,116.865 99.06,117.246 R9.1@99.884,117.246 R7.1@99.884,113.055 ; v1(87.503,133.595) 87.483,133.575 U2.45@87.483,131.504 87.483,129.932 88.138,129.277 90.805,129.277 93.345,126.737 97.663,126.737 98.679,127.753 98.679,134.865 99.06,135.246 R9.1@99.884,135.246 R7.1@99.884,131.055 ; R7.1@130.243,66.862 R9.1@130.243,62.671 131.067,62.671 131.448,63.052 131.448,70.164 132.464,71.18 136.782,71.18 139.322,68.64 141.989,68.64 142.644,67.985 U2.45@142.644,66.413 142.644,64.342 v1(142.624,64.322) ; R7.1@130.243,84.862 R9.1@130.243,80.671 131.067,80.671 131.448,81.052 131.448,88.164 132.464,89.18 136.782,89.18 139.322,86.64 141.989,86.64 142.644,85.985 U2.45@142.644,84.413 142.644,82.342 v1(142.624,82.322) ; R7.1@130.243,102.862 R9.1@130.243,98.671 131.067,98.671 131.448,99.052 131.448,106.164 132.464,107.18 136.782,107.18 139.322,104.64 141.989,104.64 142.644,103.985 U2.45@142.644,102.413 142.644,100.342 v1(142.624,100.322) ; R7.1@130.243,120.862 R9.1@130.243,116.671 131.067,116.671 131.448,117.052 131.448,124.164 132.464,125.18 136.782,125.18 139.322,122.64 141.989,122.64 142.644,121.985 U2.45@142.644,120.413 142.644,118.342 v1(142.624,118.322) ; R7.1@130.243,138.862 R9.1@130.243,134.671 131.067,134.671 131.448,135.052 131.448,142.164 132.464,143.18 136.782,143.18 139.322,140.64 141.989,140.64 142.644,139.985 U2.45@142.644,138.413 142.644,136.342 v1(142.624,136.322) ; v1(144.402,64.322) 144.402,60.893 145.644,59.651 U2.22@145.644,57.913 ; v1(144.402,82.322) 144.402,78.893 145.644,77.651 U2.22@145.644,75.913 ; v1(144.402,100.322) 144.402,96.893 145.644,95.651 U2.22@145.644,93.913 ; v1(144.402,118.322) 144.402,114.893 145.644,113.651 U2.22@145.644,111.913 ; v1(144.402,136.322) 144.402,132.893 145.644,131.651 U2.22@145.644,129.913
  Bottom Layer w0.254: v1(85.725,61.595) v1(87.503,61.595) ; v1(85.725,79.595) v1(87.503,79.595) ; v1(85.725,97.595) v1(87.503,97.595) ; v1(85.725,115.595) v1(87.503,115.595) ; v1(85.725,133.595) v1(87.503,133.595) ; v1(142.624,64.322) v1(144.402,64.322) ; v1(142.624,82.322) v1(144.402,82.322) ; v1(142.624,100.322) v1(144.402,100.322) ; v1(142.624,118.322) v1(144.402,118.322) ; v1(142.624,136.322) v1(144.402,136.322)
"SWIM IN": R9.2 U2.21 U2.43 U2.46 | length 383.5
  Top Layer w0.254: U2.21@84.983,68.004 84.983,66.528 86.483,65.028 86.483,62.865 ; U2.21@84.983,86.004 84.983,84.528 86.483,83.028 86.483,80.865 ; U2.21@84.983,104.004 84.983,102.528 86.483,101.028 86.483,98.865 ; U2.21@84.983,122.004 84.983,120.528 86.483,119.028 86.483,116.865 ; U2.21@84.983,140.004 84.983,138.528 86.483,137.028 86.483,134.865 ; U2.43@86.483,59.504 86.483,62.865 ; U2.43@86.483,77.504 86.483,80.865 ; U2.43@86.483,95.504 86.483,98.865 ; U2.43@86.483,113.504 86.483,116.865 ; U2.43@86.483,131.504 86.483,134.865 ; R9.2@101.284,63.246 101.284,63.816 100.711,64.389 98.933,64.389 98.044,63.5 98.044,56.261 97.282,55.499 93.472,55.499 91.059,57.912 88.646,57.912 87.983,58.575 U2.46@87.983,59.504 87.983,60.805 88.392,61.214 88.392,62.103 87.63,62.865 86.483,62.865 ; R9.2@101.284,81.246 101.284,81.816 100.711,82.389 98.933,82.389 98.044,81.5 98.044,74.261 97.282,73.499 93.472,73.499 91.059,75.912 88.646,75.912 87.983,76.575 U2.46@87.983,77.504 87.983,78.805 88.392,79.214 88.392,80.103 87.63,80.865 86.483,80.865 ; R9.2@101.284,99.246 101.284,99.816 100.711,100.389 98.933,100.389 98.044,99.5 98.044,92.261 97.282,91.499 93.472,91.499 91.059,93.912 88.646,93.912 87.983,94.575 U2.46@87.983,95.504 87.983,96.805 88.392,97.214 88.392,98.103 87.63,98.865 86.483,98.865 ; R9.2@101.284,117.246 101.284,117.816 100.711,118.389 98.933,118.389 98.044,117.5 98.044,110.261 97.282,109.499 93.472,109.499 91.059,111.912 88.646,111.912 87.983,112.575 U2.46@87.983,113.504 87.983,114.805 88.392,115.214 88.392,116.103 87.63,116.865 86.483,116.865 ; R9.2@101.284,135.246 101.284,135.816 100.711,136.389 98.933,136.389 98.044,135.5 98.044,128.261 97.282,127.499 93.472,127.499 91.059,129.912 88.646,129.912 87.983,130.575 U2.46@87.983,131.504 87.983,132.805 88.392,133.214 88.392,134.103 87.63,134.865 86.483,134.865 ; R9.2@128.843,62.671 128.843,62.101 129.416,61.528 131.194,61.528 132.083,62.417 132.083,69.656 132.845,70.418 136.655,70.418 139.068,68.005 141.481,68.005 142.144,67.342 U2.46@142.144,66.413 142.144,65.112 141.735,64.703 141.735,63.814 142.497,63.052 143.644,63.052 ; R9.2@128.843,80.671 128.843,80.101 129.416,79.528 131.194,79.528 132.083,80.417 132.083,87.656 132.845,88.418 136.655,88.418 139.068,86.005 141.481,86.005 142.144,85.342 U2.46@142.144,84.413 142.144,83.112 141.735,82.703 141.735,81.814 142.497,81.052 143.644,81.052 ; R9.2@128.843,98.671 128.843,98.101 129.416,97.528 131.194,97.528 132.083,98.417 132.083,105.656 132.845,106.418 136.655,106.418 139.068,104.005 141.481,104.005 142.144,103.342 U2.46@142.144,102.413 142.144,101.112 141.735,100.703 141.735,99.814 142.497,99.052 143.644,99.052 ; R9.2@128.843,116.671 128.843,116.101 129.416,115.528 131.194,115.528 132.083,116.417 132.083,123.656 132.845,124.418 136.655,124.418 139.068,122.005 141.481,122.005 142.144,121.342 U2.46@142.144,120.413 142.144,119.112 141.735,118.703 141.735,117.814 142.497,117.052 143.644,117.052 ; R9.2@128.843,134.671 128.843,134.101 129.416,133.528 131.194,133.528 132.083,134.417 132.083,141.656 132.845,142.418 136.655,142.418 139.068,140.005 141.481,140.005 142.144,139.342 U2.46@142.144,138.413 142.144,137.112 141.735,136.703 141.735,135.814 142.497,135.052 143.644,135.052 ; U2.43@143.644,66.413 143.644,63.052 ; U2.43@143.644,84.413 143.644,81.052 ; U2.43@143.644,102.413 143.644,99.052 ; U2.43@143.644,120.413 143.644,117.052 ; U2.43@143.644,138.413 143.644,135.052 ; U2.21@145.144,57.913 145.144,59.389 143.644,60.889 143.644,63.052 ; U2.21@145.144,75.913 145.144,77.389 143.644,78.889 143.644,81.052 ; U2.21@145.144,93.913 145.144,95.389 143.644,96.889 143.644,99.052 ; U2.21@145.144,111.913 145.144,113.389 143.644,114.889 143.644,117.052 ; U2.21@145.144,129.913 145.144,131.389 143.644,132.889 143.644,135.052
"SWIM RST": R13.2 R14.2 U2.42 | length 61.5
  Top Layer w0.254: R14.2@82.996,55.626 R13.2@84.771,55.626 84.771,56.831 85.983,58.043 U2.42@85.983,59.504 ; R14.2@82.996,73.626 R13.2@84.771,73.626 84.771,74.831 85.983,76.043 U2.42@85.983,77.504 ; R14.2@82.996,91.626 R13.2@84.771,91.626 84.771,92.831 85.983,94.043 U2.42@85.983,95.504 ; R14.2@82.996,109.626 R13.2@84.771,109.626 84.771,110.831 85.983,112.043 U2.42@85.983,113.504 ; R14.2@82.996,127.626 R13.2@84.771,127.626 84.771,128.831 85.983,130.043 U2.42@85.983,131.504 ; U2.42@144.144,66.413 144.144,67.874 145.356,69.086 R13.2@145.356,70.291 R14.2@147.131,70.291 ; U2.42@144.144,84.413 144.144,85.874 145.356,87.086 R13.2@145.356,88.291 R14.2@147.131,88.291 ; U2.42@144.144,102.413 144.144,103.874 145.356,105.086 R13.2@145.356,106.291 R14.2@147.131,106.291 ; U2.42@144.144,120.413 144.144,121.874 145.356,123.086 R13.2@145.356,124.291 R14.2@147.131,124.291 ; U2.42@144.144,138.413 144.144,139.874 145.356,141.086 R13.2@145.356,142.291 R14.2@147.131,142.291